# EAGLE board Automatiles (EAGLE 7.3.0)
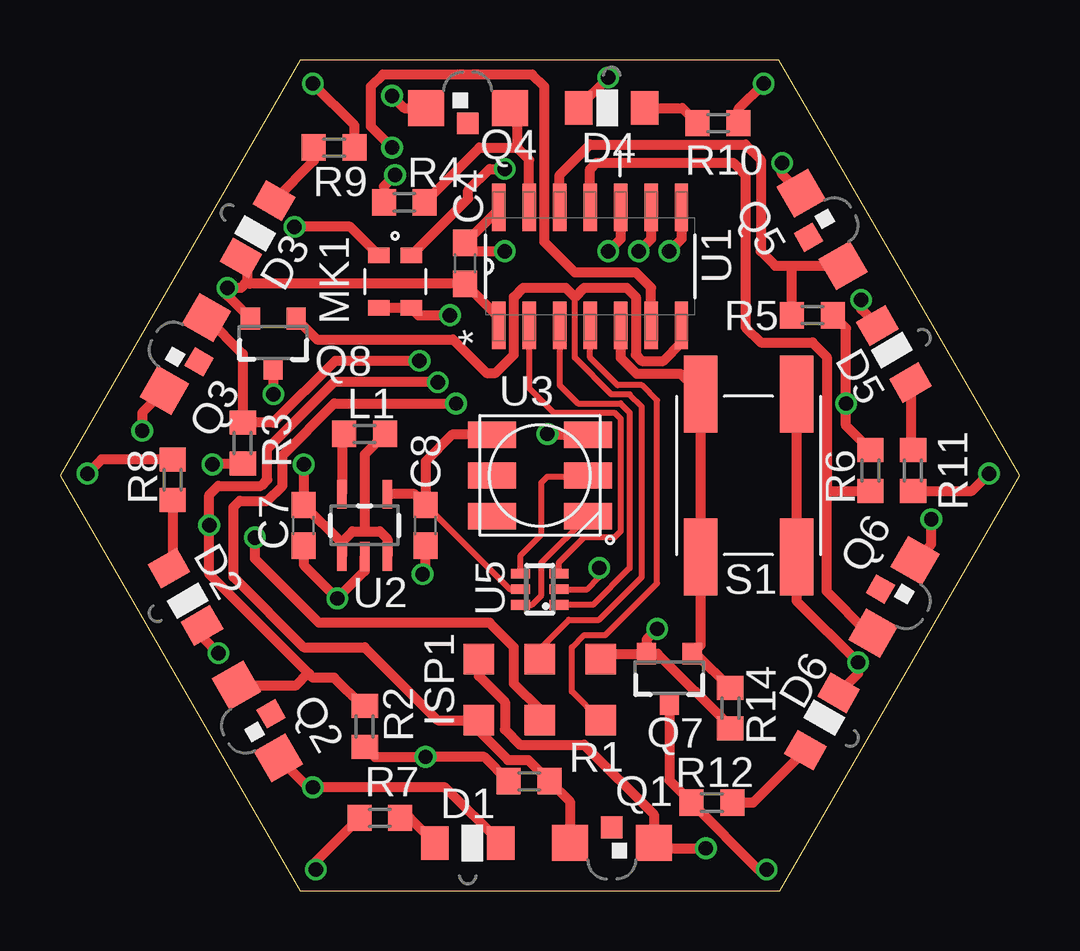
[diagram p0: board, top side]
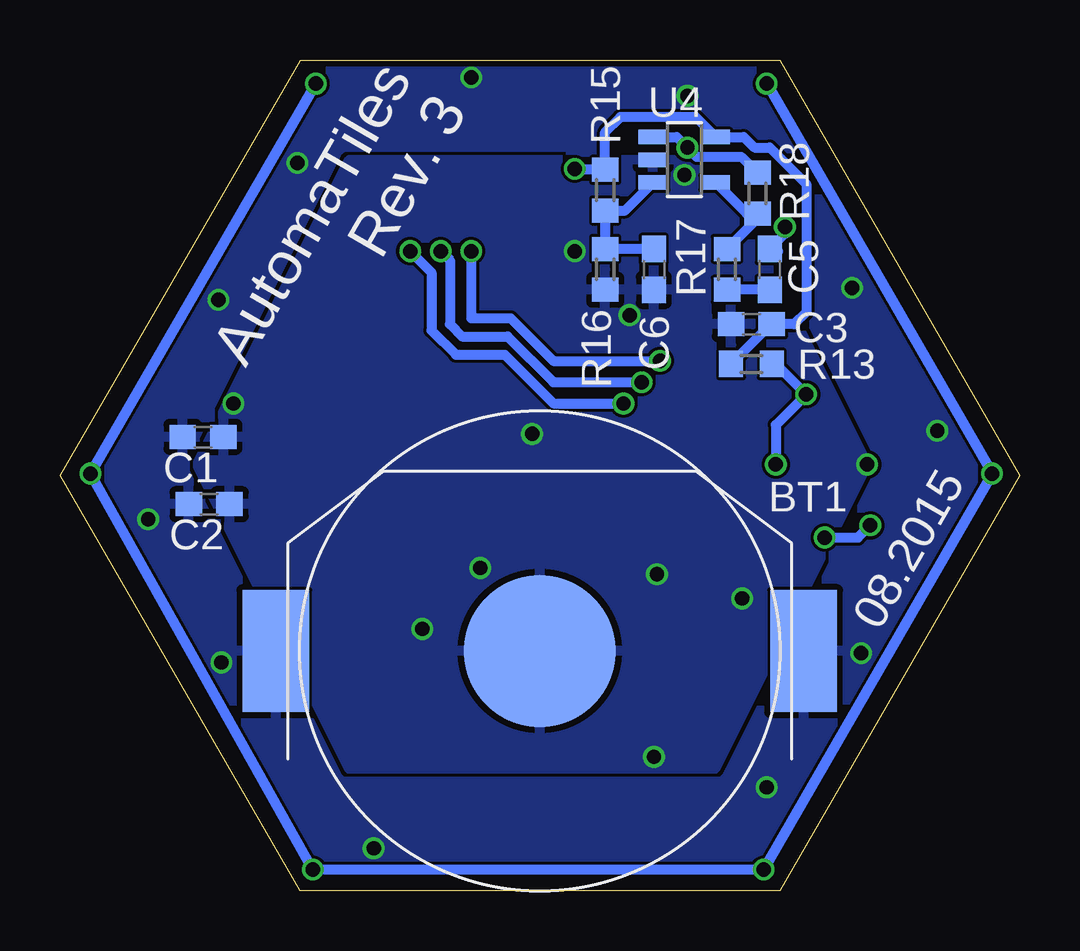
[diagram p1: board, bottom side, seen from below]

Size 40 x 34.64 mm. Coordinates in mm from the lower left corner, seen from the top.
Outline: 10,0 30,0 40,17.32 29.97,34.64 10,34.64 0,17.32 10,0
Copper layers (1*16): Top 0.035mm / dielectric 1.5mm / Bottom 0.035mm
Design rules "dirt_cheap_dirty_boards.v1 *": minimum track width 5mil, minimum drill 8mil, track to track 5mil, track to pad 5mil, pad to pad 5mil, via to via 5mil, smd to smd 0mil, copper to edge 10mil, drill to drill 10mil, minimum pad ring 10mil, minimum via ring 6mil, stop-mask expansion 2mil, vias tented up to drill 25mil, thermal gap 10mil

## Footprints (pad centres in the part's own frame; a part is rotated, then mirrored left to right if it is on the bottom)
BAT-HLD-2032-SMD = smd 6.35 x 6.35: GND 0,0 | smd 2.79 x 5.08: POS1 -11,0; POS2 11,0
C0603 = smd 1.1 x 1: 1 -0.85,0; 2 0.85,0
LED-SIDELOOKING = smd 1.154 x 1.4: A -1.377,0; C 1.377,0
AVRISP-POGO = smd 1.27 x 1.27: GND 2.54,1.27; MISO -2.54,-1.27; MOSI 0,1.27; RESET 2.54,-1.27; SCK 0,-1.27; VCC -2.54,1.27
R0603 = smd 1 x 1.1: 1 -0.85,0; 2 0.85,0
MEMS-MIC = smd 0.9 x 0.66: GNDA -0.675,-1.095; GNDB 0.675,-1.095; OUTPUT -0.675,1.095; VCC 0.675,1.095
SMD-PHOTOTRANSISTOR-LP = smd 1.5 x 1.5: COLLECTOR -1.75,0; EMITTER 1.75,0 | smd 0.9 x 0.9: NC 0,-0.65
SOT23-3 = smd 0.8 x 0.9: 1 -0.95,-1; 2 0.95,-1; 3 0,1.1
TACT-SWITCH-6MM = smd 3.2 x 1.4: A -3.4,-2; A' 3.4,-2; B -3.4,2; B' 3.4,2
SOIC127P600X175-14N = smd 1.981 x 0.559: 1 -2.464,3.81; 2 -2.464,2.54; 3 -2.464,1.27; 4 -2.464,0; 5 -2.464,-1.27; 6 -2.464,-2.54; 7 -2.464,-3.81; 8 2.464,-3.81; 9 2.464,-2.54; 10 2.464,-1.27; 11 2.464,0; 12 2.464,1.27; 13 2.464,2.54; 14 2.464,3.81
SOT-23-5 = smd 0.4 x 1.2: CE -0.95,-1.3; GND 0,-1.3; LX -0.95,1.3; VBAT 0.95,-1.3; VOUT 0.95,1.3
WS2812 = smd 2 x 1.1: DI 2,0; DO 2,-1.7; LEDVDD -2,0; NC -2,1.7; VDD 2,1.7; VSS -2,-1.7
SOT23-5 = smd 0.6 x 1.2: 1 -0.95,-1.306; 2 0,-1.306; 3 0.95,-1.306; 4 0.95,1.306; 5 -0.95,1.306
SOT363 = smd 0.4 x 0.8: 1 -0.65,-0.8; 2 0,-0.8; 3 0.65,-0.8; 4 0.65,0.8; 5 0,0.8; 6 -0.65,0.8

## Placement (x,y rotation side)
BT1  BAT-HLD-2032-SMD  [BAT-HLD-2032-SMD]  20,10 0 bottom
C1  1uF  [C0603]  34.04,18.92 180 bottom
C2  10uF  [C0603]  33.78,16.13 180 bottom
C3  10uF  [C0603]  11.18,23.62 0 bottom
C4  100nF  [C0603]  16.89,26.16 90 top
C5  1uF  [C0603]  10.41,25.91 90 bottom
C6  100nF  [C0603]  15.24,25.91 270 bottom
C7  10uF  [C0603]  10.16,15.24 90 top
C8  10uF  [C0603]  15.24,15.24 90 top
D1  LED-SIDELOOKING-IR26-51C  [LED-SIDELOOKING]  17,2 180 top
D2  LED-SIDELOOKING-IR26-51C  [LED-SIDELOOKING]  5.23,12.26 120 top
D3  LED-SIDELOOKING-IR26-51C  [LED-SIDELOOKING]  8.23,27.58 60 top
D4  LED-SIDELOOKING-IR26-51C  [LED-SIDELOOKING]  23,32.64 0 top
D5  LED-SIDELOOKING-IR26-51C  [LED-SIDELOOKING]  34.77,22.38 300 top
D6  LED-SIDELOOKING-IR26-51C  [LED-SIDELOOKING]  31.77,7.06 240 top
ISP1  AVRISP-POGO  [AVRISP-POGO]  20,8.38 0 top
L1  4.7uH  [R0603]  12.7,19.05 180 top
MK1  MICROPHONE-MEMS  [MEMS-MIC]  13.97,25.4 0 top
Q1  PHOTOTRANSISTOR-SFH-325LOW-PROFILE  [SMD-PHOTOTRANSISTOR-LP]  23,2 180 top
Q2  PHOTOTRANSISTOR-SFH-325LOW-PROFILE  [SMD-PHOTOTRANSISTOR-LP]  8.23,7.06 120 top
Q3  PHOTOTRANSISTOR-SFH-325LOW-PROFILE  [SMD-PHOTOTRANSISTOR-LP]  5.23,22.38 60 top
Q4  PHOTOTRANSISTOR-SFH-325LOW-PROFILE  [SMD-PHOTOTRANSISTOR-LP]  17,32.64 0 top
Q5  PHOTOTRANSISTOR-SFH-325LOW-PROFILE  [SMD-PHOTOTRANSISTOR-LP]  31.77,27.58 300 top
Q6  PHOTOTRANSISTOR-SFH-325LOW-PROFILE  [SMD-PHOTOTRANSISTOR-LP]  34.77,12.26 240 top
Q7  BSS138  [SOT23-3]  25.4,8.89 180 top
Q8  BSS84  [SOT23-3]  8.89,22.86 180 top
R1  22k  [R0603]  19.56,4.57 0 top
R2  22k  [R0603]  12.7,6.86 90 top
R3  22k  [R0603]  7.62,18.67 90 top
R4  22k  [R0603]  14.35,28.7 0 top
R5  22k  [R0603]  31.37,24 180 top
R6  22k  [R0603]  33.78,17.53 270 top
R7  2k  [R0603]  13.34,3.05 0 top
R8  2k  [R0603]  4.7,17.14 270 top
R9  2k  [R0603]  11.43,30.99 180 top
R10  2k  [R0603]  27.43,32 180 top
R11  2k  [R0603]  35.56,17.53 90 top
R12  2k  [R0603]  27.18,3.68 0 top
R13  470  [R0603]  11.18,21.97 180 bottom
R14  22k  [R0603]  27.94,7.62 270 top
R15  22k  [R0603]  17.27,29.21 270 bottom
R16  22k  [R0603]  17.27,25.91 270 bottom
R17  1k  [R0603]  12.19,25.91 270 bottom
R18  100k  [R0603]  10.92,29.08 270 bottom
S1  TACT-SWITCH-GENERAL  [TACT-SWITCH-6MM]  28.7,17.32 270 top
U1  ATTINY84-20SSU  [SOIC127P600X175-14N]  22.1,26.04 90 top
U2  DC-DC-BOOST-XC9140  [SOT-23-5]  12.7,15.24 0 top
U3  APA102C  [WS2812]  20,17.32 0 top
U4  MCP601OT  [SOT23-5]  13.97,30.48 270 bottom
U5  74HCT2G17  [SOT363]  20,12.57 90 top

## Library data of the parts
BT1 = batteries; DIGIKEY: BK-912-ND
C1-C8 R1-R18 = resistor
D1-D6 MK1 Q1-Q6 S1 U2 = automatiles-extras
ISP1 U3 = adafruit
L1 = rcl
Q7 = fets
Q8 = transistor-small-signal
U1 = Atmel_By_element14_Batch_1-00; MPN: ATTINY84-20SSU; OC_FARNELL: 1636955; OC_NEWARK: 03P2040; PACKAGE: SOIC-14; SUPPLIER: Atmel
U4 = linear
U5 = 74xx-little-us

## Nets
5V: C8.2 U2.VOUT U3.NC U5.5
GND: BT1.GND C1.1 C2.1 C3.1 C4.2 C6.2 C7.1 C8.1 ISP1.GND MK1.GNDA MK1.GNDB Q7.2 R1.1 R2.1 R3.1 R4.1 R5.1 R6.1 R14.2 R16.2 U1.14 U2.GND U3.VDD U4.2 U5.2
LX: L1.2 U2.LX
N$1: U1.2 U5.3
N$2: U1.3 U5.1
N$3: D1.C R7.2
N$4: D2.C R8.2
N$5: D3.C R9.2
N$6: D4.C R10.2
N$7: D5.C R11.2
N$8: D6.C R12.2
N$9: Q7.3 R7.1 R8.1 R9.1 R10.1 R11.1 R12.1
N$10: Q7.1 R14.1 S1.A S1.A' U1.5
N$11: C5.2 MK1.OUTPUT
N$12: C6.1 R15.2 R16.1 U4.3
N$13: R17.1 R18.2 U4.4
N$14: U3.DI U5.4
N$15: R18.1 U1.6 U4.1
N$16: U3.DO U5.6
N$17: ISP1.RESET U1.4
N$18: ISP1.MOSI Q8.1 U1.7
PHOTO0: ISP1.MISO Q1.EMITTER R1.2 U1.8
PHOTO1: ISP1.SCK Q2.EMITTER R2.2 U1.9
PHOTO2: Q3.EMITTER R3.2 U1.10
PHOTO3: Q4.EMITTER R4.2 U1.13
PHOTO4: Q5.EMITTER R5.2 U1.12
PHOTO5: Q6.EMITTER R6.2 U1.11
TEST: C5.1 R17.2
V+: C3.2 MK1.VCC R13.2 R15.1 U4.5
VCC: BT1.POS1 BT1.POS2 C1.2 C2.2 C4.1 D1.A D2.A D3.A D4.A D5.A D6.A ISP1.VCC Q1.COLLECTOR Q2.COLLECTOR Q3.COLLECTOR Q4.COLLECTOR Q5.COLLECTOR Q6.COLLECTOR Q8.2 S1.B S1.B' U1.1
VCCINT: C7.2 L1.1 Q8.3 R13.1 U2.CE U2.VBAT

## Tracks (layer width: path | path; a pad name or v marks a point on that pad's centre or on a via)
5V
  Top 0.254: C8.2 18.76,12.57 U5.5
  Top 0.406: U2.VOUT 14.79,16.54 C8.2 15.24,17.91 16.35,19.02 U3.NC
GND  (via drill 0.6)
  Top 0.254: U5.2 21.97,12.57 22.48,13.08 v22.48,13.46
  Top 0.406: v13.97,29.84 13.5,29.38 R4.1 | v6.35,17.78 6.39,17.82 R3.1 | R2.1 13.12,5.59 v15.24,5.59 17.69,5.59 R1.1 | U2.GND 12.7,13.34 v11.56,12.19 10.16,13.59 C7.1 | Q7.2 24.91,9.89 27.94,6.86 R14.2 | v16.26,24 14.95,24 MK1.GNDB MK1.GNDA | U1.14 18.29,28.41 C4.2 17.23,26.67 v18.54,26.67 | v20.32,19.05 20.35,19.02 U3.VDD | ISP1.GND 22.78,9.89 Q7.2 | v24.89,10.92 24.45,10.48 Q7.2 | R6.1 32.77,19.39 v32.77,20.32 32.77,23.46 R5.1 | v15.11,13.21 15.24,13.34 C8.1
  Bottom 0.406: 19.84,10.16 BT1.GND
  pour Bottom: 12.7,5.08 27.94,5.08 34.29,17.78 27.94,30.48 12.7,30.48 6.35,17.78
LX
  Top 0.406: L1.2 11.75,18.95 U2.LX
N$1
  Top 0.254: U1.2 19.56,20.95 20.57,19.94 23.11,19.94 23.37,19.68 23.37,14.99 23.11,14.73 21.84,14.73 20.8,13.69 U5.3
N$2
  Top 0.254: U1.3 20.83,21.08 21.59,20.32 23.37,20.32 23.75,19.94 23.75,13.46 22.21,11.92 U5.1
N$3
  Top 0.406: R7.2 14.57,3.05 D1.C
N$4
  Top 0.406: R8.2 4.7,13.61 D2.C
N$5
  Top 0.406: R9.2 10.58,30.43 D3.C
N$6
  Top 0.406: D4.C 25.95,32.64 R10.2
N$7
  Top 0.406: D5.C 35.46,18.48 R11.2
N$8
  Top 0.406: R12.2 28.9,3.68 D6.C
N$9  (via drill 0.6)
  Top 0.406: Q7.3 25.4,4.61 R12.1 29.12,0.89 v29.46,0.89 | R8.1 1.74,18 v1.14,17.4 | R9.1 12.28,31.92 v10.54,33.66 | R10.1 28.28,32.6 v29.34,33.66 | R11.1 38.01,16.68 v38.73,17.4 | v10.67,0.89 10.67,1.23 R7.1
  Bottom 0.406: v29.34,33.66 v38.73,17.4 v29.46,0.89 v10.67,0.89 v1.14,17.4 v10.54,33.66
N$10
  Top 0.406: U1.5 23.37,22.23 24.04,21.56 25.86,21.56 S1.A S1.A' 26.7,10.24 Q7.1 26.52,9.89 R14.1
N$11  (via drill 0.6)
  Top 0.406: v9.78,27.69 12.1,27.69 MK1.OUTPUT
  Bottom 0.406: 10.07,26.67 C5.2 9.78,27.39 v9.78,27.69
N$12
  Bottom 0.406: C6.1 R16.1 R15.2 16.45,28.36 U4.3
N$13
  Bottom 0.406: R17.1 10.92,28.03 R18.2 11.37,28.23 U4.4
N$14
  Top 0.254: U3.DI 21.95,17.27 20.32,17.27 20.07,17.02 20.07,14.86 19.2,13.99 U5.4
N$15  (via drill 0.6)
  Top 0.406: U1.6 24.64,25.15 24,25.78 21.46,25.78 20.19,27.05 20.19,33.53 19.68,34.04 13.46,34.04 12.95,33.53 12.95,31.88 v13.84,30.99
  Bottom 0.406: U4.1 14.29,31.43 v13.84,30.99 13.46,30.61 11.6,30.61 R18.1
N$16
  Top 0.254: U5.6 19.67,11.92 20.07,12.32 20.07,13.69 U3.DO
N$17
  Top 0.254: U1.4 22.1,22.23 23.24,21.08 24.26,21.08 24.89,20.45 24.89,12.83 22.73,10.67 21.84,10.67 21.34,10.16 21.34,8.32 ISP1.RESET
N$18
  Top 0.254: ISP1.MOSI 20,10.09 21.21,11.3 22.48,11.3 24.26,13.08 24.26,20.19 23.75,20.7 22.99,20.7 21.46,22.23 21.46,24.77
  Top 0.406: Q8.1 10.71,22.99 16.38,22.99 17.78,21.59 18.16,21.59 18.92,22.35 18.92,24.77 19.3,25.15 21.08,25.15 21.46,24.77 21.84,25.15 23.62,25.15 24,24.77 24,22.35 24.26,22.1 25.15,22.1 25.91,22.86 U1.7
PHOTO0  (via drill 0.6)
  Top 0.406: U1.8 25.91,27.18 v25.4,26.67 | v16.51,20.32 11.43,20.32 9.27,18.16 9.27,16.89 8.64,16.26 7.49,16.26 7.24,16 7.24,13.08 10.16,10.16 12.7,10.16 15.75,7.11 ISP1.MISO 17.46,6.67 18.67,5.46 19.52,5.46 R1.2 21.25,3.73 Q1.EMITTER
  Bottom 0.406: v25.4,26.67 24.51,25.78 24.51,23.37 23.5,22.35 21.46,22.35 19.43,20.32 v16.51,20.32
PHOTO1  (via drill 0.6)
  Top 0.406: U1.9 24.64,27.18 v24.13,26.67 | v15.75,21.21 11.43,21.21 8.64,18.41 8.64,17.14 8.38,16.89 6.6,16.89 6.22,16.51 v6.22,15.24 6.22,13.21 10.35,9.08 | R2.2 12.61,7.71 11.43,8.89 10.54,8.89 10.35,9.08 | Q2.EMITTER 9.85,8.58 10.35,9.08 | ISP1.SCK 20,7.56 18.92,8.64 18.92,10.16 17.91,11.18 10.79,11.18 8.13,13.84 v8.13,14.73
  Bottom 0.406: v24.13,26.67 23.75,26.29 23.75,23.62 23.24,23.11 21.34,23.11 19.43,21.21 v15.75,21.21 | v8.13,14.73 6.73,14.73 v6.22,15.24
PHOTO2  (via drill 0.6)
  Top 0.406: U1.10 23.37,27.18 v22.86,26.67 | v14.99,22.1 11.47,22.1 8.89,19.52 R3.2 7.62,22.39 Q3.EMITTER
  Bottom 0.406: v22.86,26.67 22.86,23.88 21.21,23.88 19.43,22.1 v14.99,22.1
PHOTO3
  Top 0.406: U1.13 19.56,30.48 19.05,30.99 | Q4.EMITTER 19.05,32.34 19.05,30.99 | R4.2 17.49,30.99 19.05,30.99
PHOTO4
  Top 0.406: U1.12 20.83,29.84 22.1,31.11 28.57,31.11 29.21,30.48 29.21,26.67 29.82,26.06 30.48,26.06 | 30.48,26.06 Q5.EMITTER 32.26,25.68 | R5.2 30.52,26.02 30.48,26.06
PHOTO5
  Top 0.406: U1.11 22.1,30.1 22.35,30.35 28.07,30.35 28.57,29.84 28.57,23.5 29.21,22.86 31.37,22.86 31.96,22.26 31.96,16.68 | 33.66,16.51 R6.2 31.96,16.68 | Q6.EMITTER 33.71,10.74 31.96,12.48 31.96,16.68
TEST
  Bottom 0.406: C5.1 R17.2
V+  (via drill 0.6)
  Top 0.406: v18.54,30.1 17.91,30.1 17.02,29.21 17.02,28.86 MK1.VCC
  Bottom 0.406: 17.45,29.88 R15.1 | R13.2 10.38,23.62 C3.2 9.4,23.62 8.89,24.13 8.89,29.46 10.41,30.99 11.05,30.99 11.49,31.43 U4.5 13.49,32.26 16.64,32.26 17.27,31.62 R15.1 | v18.54,30.1 17.31,30.1 R15.1
VCC  (via drill 0.6)
  Top 0.406: 18.29,23.79 U1.1 18.29,23.91 C4.1 7.91,25.31 7.81,25.41 | S1.B S1.B' 30.7,12.1 v33.27,9.53 33.27,9.07 D6.A | D1.A 16.06,4.32 v10.54,4.32 10.34,4.32 Q2.COLLECTOR | D2.A 5.92,10.59 v6.6,9.91 | D3.A 7.81,26.12 7.81,25.41 | 7.81,25.41 7.54,25.15 v6.99,25.15 6.99,24.82 Q8.2 | Q5.COLLECTOR 30.1,29.89 v30.1,30.35 | D5.A 33.4,24.25 v33.4,24.64 | Q6.COLLECTOR 36.32,14.45 v36.32,15.49 | Q3.COLLECTOR 3.43,19.94 v3.43,19.18 | D4.A 21.62,32.67 v22.86,33.91 | v13.84,33.15 14.35,32.64 Q4.COLLECTOR | ISP1.VCC 17.46,8.96 18.54,7.87 18.54,6.73 19.18,6.1 21.84,6.1 24.75,3.19 Q1.COLLECTOR 24.97,1.78 v26.92,1.78
  pour Bottom (rank 2): 10.16,0.25 29.84,0.25 39.62,17.27 29.72,34.42 10.16,34.42 0.38,17.4
VCCINT  (via drill 0.6)
  Top 0.406: 12.7,14.99 12.19,14.99 11.75,14.54 U2.CE 11.75,14.5 C7.2 v10.16,17.78 | 12.7,14.99 13.34,14.99 13.65,14.67 U2.VBAT | L1.1 12.7,18.2 12.7,14.99 | Q8.3 v8.89,20.7
  Bottom 0.406: v10.16,17.78 10.16,19.43 v8.89,20.7 10.16,21.97 R13.1

## Text on the board
bNames: AutomaTiles / Rev. 3 | 08.2015